# Altium PCB m18.PcbDoc
Units mm, origin at the board's own origin, x right, y up, seen from the top; angles counter-clockwise.
Board outline 152.4 x 101.6 mm, 2 copper layers (Top Layer, Bottom Layer); 50 components, 34 nets, 135 pads, 25 vias.
Unrouted connection lines stored in the file: 4.
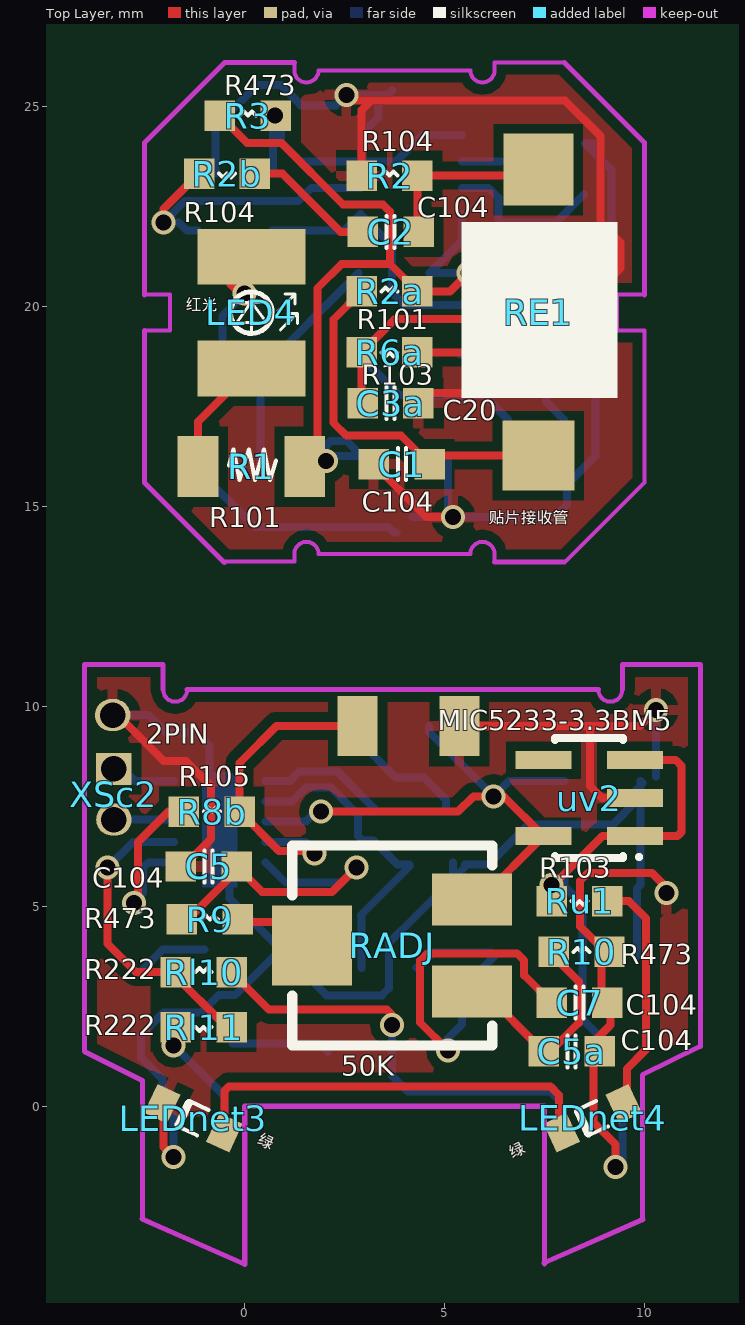
[diagram p0: Top Layer view]
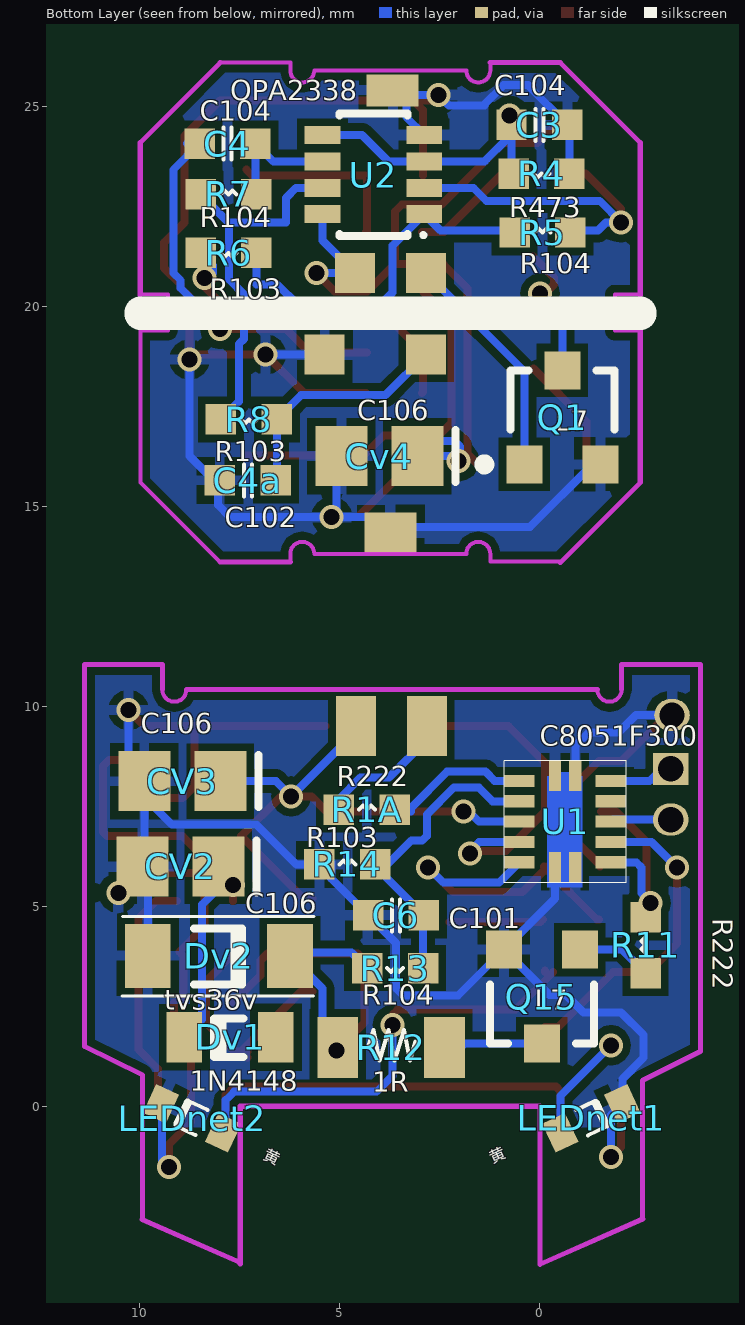
[diagram p1: Bottom Layer view, seen from below]

## Layer stack, top to bottom
Top Layer: signal copper 0.0356
Dielectric: dielectric 0.32, FR-4, Dk 4.8
Bottom Layer: signal copper 0.0356

## Board outline
-29.555,-27.62 122.845,-27.62 122.845,73.98 -29.555,73.98

## Design rules (kind name [scope] priority, off if disabled: settings)
Clearance [All] p1: gap=0.2
PolygonConnect [All] p1: connectstyle=Relief reliefconductorwidth=0.254 reliefentries=4 polygonreliefangle="90 Angle"
RoutingVias [All] p1: holewidth=0.4 width=0.6 viastyle="Through Hole" minholewidth=0.4 minwidth=0.6 maxholewidth=0.4 maxwidth=0.6
SilkToSilkClearance [All] p1 off: silktosilkclearance=0.254
SilkscreenOverComponentPads [All] p1 off: minsilkscreentomaskgap=0.254
SolderMaskExpansion [All] p1: expansion=0.102
TestPointUsage [All] p1: valid=0 allowmultiple=FALSE
Testpoint [All] p1: side=15 testpointundercomponent=TRUE minsize=1.016 maxsize=2.54 preferedsize=1.524 minholesize=0 maxholesize=1.016 preferedholesize=0.813 testpointgrid=0.025 style=1023 order=0-112345678
Width [All] p1: maxlimit=0.2 minlimit=0.2 preferedwidth=0.2
22 further rules are at their usual default settings.

## Components (designator, comment, footprint, x,y, rotation, side; value= is the part's Value field where it differs from the comment)
C1 "C104" C0603 4.623,16.053 r180 top
C2 "C104" C0603 4.345,21.858 r180 top
C3 "C104" C0603 0.711,24.536 r180 bottom
C3a "C20" C0603 2.946,17.577 r0 top
C4 "C104" C0603 8.51,24.068 r180 bottom
C4a "C102" C0603 6.604,15.646 r0 bottom
C5 "C104" C0603 -0.203,5.994 r180 top
C5a "C104" C0603 7.472,1.372 r0 top
C6 "C101" C0603 2.901,4.775 r0 bottom
C7 "C104" C0603 7.671,2.591 r0 top
CV2 "C106" C0805 8.992,5.994 r0 bottom
CV3 "C106" C0805 8.941,8.128 r0 bottom
Cv4 "C106" C0805 4.013,16.256 r0 bottom
Dv1 "1N4148" D0805 6.604,1.727 r0 bottom
Dv2 "tvs36v" D1206 8.026,3.759 r180 bottom
LED4 "红光" LED-1210#1 0.164,19.842 r0 top
LEDnet1 "黄" d0603 -0.508,-0.66 r155 bottom
LEDnet2 "黄" d0603 7.921,-0.658 r25 bottom
LEDnet3 "绿" d0603 -0.508,-0.66 r155 top
LEDnet4 "绿" d0603 9.475,0.067 r205 top
Q1 "L7" SOT23A -0.559,17.221 r180 bottom
Q15 "L7" SOT23A -0.051,2.743 r0 bottom
R1 "R101" R0805 1.5,15.991 r180 top
R1A "R222" R0603-A#1 5.029,7.417 r0 bottom
R2 "R104" R0603-A#2 4.318,23.266 r180 top
R2a "R101" R0603-A#2 4.318,20.371 r180 top
R2b "R104" R0603-A#1 0.254,23.317 r0 top
R3 "R473" R0603-A#2 0.776,24.765 r180 top
R4 "R473" R0603-A#2 0.66,23.317 r180 bottom
R5 "R104" R0603-A#2 -0.762,21.844 r0 bottom
R6 "R103" R0603-A#2 8.484,21.336 r180 bottom
R6a "R103" R0603-A#1 4.318,18.847 r0 top
R7 "R104" R0603-A#2 7.088,22.798 r0 bottom
R8 "R103" R0603-A#2 7.976,17.17 r180 bottom
R8b "R105" R0603-A#1 -1.524,7.366 r180 top
R9 "R473" R0603-A#1 -1.575,4.674 r180 top
R10 "R473" R0603-A#1 7.722,3.861 r180 top
R11 "R222" R0603-A#2 -2.642,4.724 r270 bottom
R12 "1R" R0805 2.388,1.473 r0 bottom
R13 "R104" R0603-A#2 4.318,3.454 r180 bottom
R14 "R103" R0603-A#2 4.115,6.045 r0 bottom
RADJ "50K" POT4MM-2 3.687,4.018 r180 top
RE1 "贴片接收管" LED-1210#2 7.342,19.839 r180 top
Rl10 "R222" R0603 -1.727,3.353 r0 top
Rl11 "R222" R0603 -0.33,1.981 r180 top
Ru1 "R103" R0603-A#2 7.671,5.131 r0 top
U1 "C8051F300" IC3-3-14P -0.63,7.116 r270 bottom
U2 "OPA2338" SOT23-8 2.896,22.301 r90 bottom
uv2 "MIC5233-3.3BM5" SOT-457 9.754,6.756 r90 top
XSc2 "2PIN" PIN2-1.27 -3.271,8.437 r0 top

## Footprints (in the part's own frame and the unit in brackets; to place one, negate y for a bottom-side part, rotate by r counter-clockwise, add the part's x,y. Pads: shape width x height; smd on the part's side, far side on the other; paste and mask are expansions set on the pad)
C0603 [mil]
  rect 30x30 smd: 1(0,0) 2(55,0)
  silkscreen extent 24,-16 31,16
C0805 [mm] "Chip Capacitor; Body 2.0 x 1.2 mm (LxW typ)"
  rect 1.3x1.5 smd: 1(-0.95,0) 2(0.95,0)
  silkscreen extent -1.9,-0.65 -1.9,0.65
d0603 [mm]
  rect 0.635x0.8 smd: 1(0,0) 2(1.715,0)
  silkscreen extent 0.6,-0.35 1.13,0.35
D0805 [mil]
  rect 35x50 smd: 1(0,0) 2(90,0)
  silkscreen extent 32,-19 61,20
D1206 [mil]
  rect 45x62.99 smd: 1(-70,0) 2(70,0)
  silkscreen extent -95,-39 94,39
IC3-3-14P [mil]
  rect 12x30 smd: 1(-40,-45) 2(-20,-45) 3(0,-45) 4(20,-45) 5(40,-45) 6(40,45) 7(20,45) 8(0,45) 9(-20,45) 10(-40,45)
  rect 30x12 smd: 11(-45,-10) 11(-45,10) 11(45,-10) 11(45,10)
  silkscreen extent -60,-60 60,60
LED-1210#1 [mil]
  rect 106.3x55 smd: 1(0,-55) 2(0,55)
  silkscreen extent -20,-20 45,20
LED-1210#2 [mil]
  rect 68.9x70.87 smd: 1(0,-140.75)
  rect 70.87x68.9 smd: 2(0,140.75)
  silkscreen extent -20,-20 45,20
PIN2-1.27 [mm]
  rect 0.889x0.8 hole 0.635: 1(0,0)
  oval 0.889x0.8 hole 0.635: 2(0,-1.27)
POT4MM-2 [mm] "Square Trimming Potentiometer"
  rect 2x1.3 smd: CCW(-2,-1.15) CW(-2,1.15)
  rect 2x2 smd: W(2,0)
  silkscreen extent -2.5,-2.5 2.5,2.5
R0603 [mil]
  rect 30x30 smd: 1(0,0) 2(55,0)
  silkscreen extent 20,0 35,4
R0603-A#1 [mil]
  rect 30x30 smd: 1(0,0) 2(-55,0)
  silkscreen extent -35,-4 -20,0
R0603-A#2 [mil]
  rect 30x30 smd: 1(0,0) 2(55,0)
  silkscreen extent 20,-4 35,0
R0805 [mil]
  rect 40x60 smd: 1(0,0) 2(105,0)
  silkscreen extent 28,-17 75,13
SOT23-8 [mm]
  rect 0.45x0.889 smd mask+0.07: 1(0,0) 2(0.66,0) 3(1.32,0) 4(1.98,0) 5(1.98,2.54) 6(1.32,2.54) 7(0.66,2.54) 8(0,2.54)
  silkscreen extent -0.57,-0.03 2.52,2.12
SOT23A [mm] "SOT-23; 3 Leads; Body 3.0 x 2.5 mm, inc. leads (LxW max)"
  rect 0.9x0.95 smd: 1(-0.95,-1.175) 2(0.95,-1.175) 3(0,1.175)
  silkscreen extent -2.07,-1.3 1.3,1.18
SOT-457 [mm]
  rect 0.45x1.397 smd: 1(0,0) 2(0.95,0) 3(1.9,0) 4(1.9,2.286) 5(0,2.286)
  silkscreen extent -0.57,-0.16 2.45,1.99

## Part data
C1 C2 C3 C3a C4 C4a C5 C5a C6 C7 CV2 CV3 Cv4: library part Cap, "Capacitor"
Dv1: library part "Diode 1N5407", "3 Amp Medium Power Silicon Rectifier Diode"
Dv2: library part "Diode BAT17", "Silicon RF Schottky Diode for Mixer Applications in the VHF/UHF Range"
LED4 LEDnet1 LEDnet2 LEDnet3 LEDnet4: library part LED0, "Typical INFRARED GaAs LED"
Q1 Q15: library part MMBT3904, "NPN Switching Transistor"
R1 R1A R2 R2a R2b R3 R4 R5 R6 R6a R7 R8 R8b R9 R10 R11 R12 R13 R14 Rl10 Rl11 Ru1: library part Res2, "Resistor"
RADJ: library part "RPot SM", "Square Trimming Potentiometer"
RE1: library part "Photo Sen", "Photosensitive Diode"
U2: library part LM833D, "Dual Low Noise, Audio Amplifier"
uv2: library part TPS77001

## Free pads (board coordinates)
  oval 0.889x0.8 hole 0.635: 0(-3.302,9.779)
  rect 1x1.5 smd: 0(2.824,9.504) 0(5.364,9.504)
  rect 1x1.5 smd far side: 0(2.824,9.504) 0(4.602,9.504)
  rect 1x1 smd far side: 0(2.844,18.796) 0(2.844,20.828) 0(4.622,20.828) 0(5.384,18.796)
  rect 1.3x0.8 smd far side: 0(3.683,25.4)
  rect 1.3x1 smd far side: 0(3.735,14.34)

## Via types
v1: diameter 0.6, hole 0.4, Top Layer to Bottom Layer, tented both sides, 25 vias

## Nets (pads, with @x,y where several pads share a name; then routed paths per layer and width w, separated by ;. In a path a pad name is that pad's centre, name@x,y a point inside that pad or via, vN(x,y) a via of type N, cw(c..) or ccw(c..) an arc to the next point about the centre after c; other vN are vias at no path point)
3.3V: CV3.1 Cv4.1 pad.0@4.602,9.504 pad.0@4.622,20.828 R1.1 R2a.1 R3.2 RADJ.CCW U1.3 U2.8 uv2.5 | length 35.9
  Top Layer w0.2: R3.2 0.06,24.084 0.917,24.084 2.462,22.539 3.453,22.539 3.629,22.364 3.629,21.06 3.637,21.052 ; R1.1 1.814,16.305 1.814,20.45 2.416,21.052 3.637,21.052 ; v1(1.905,7.366) 5.334,7.366 5.715,7.747 v1(6.223,7.747) 6.477,7.747 uv2.5 5.899,5.188 RADJ.CCW@5.687,5.188 ; v1(5.588,20.828) 5.131,20.371 R2a.1 3.637,21.052
  Bottom Layer w0.2: U1.3 1.528,7.116 1.778,7.366 v1(1.905,7.366) ; v1(2.032,16.129) 2.032,16.51 2.159,16.637 ; pad.0@4.602,9.504 4.602,9.368 v1(6.223,7.747) 6.604,8.128 CV3.1 ; U2.8 5.436,21.642 4.622,20.828 v1(5.588,20.828) ; 2.159,16.637 2.147,16.637 2.001,16.491 2.001,16.395 2.14,16.256 Cv4.1 2.921,16.256 2.54,16.637 2.159,16.637
24V: Dv1.1
+24V: CV2.1 Dv1.2 Ru1.1 uv2.1 uv2.3 | length 12
  Top Layer w0.2: Ru1.1 v1(7.671,5.537) 7.722,5.537 8.941,6.756 uv2.1 10.82,6.756 10.922,6.858 10.922,8.509 10.775,8.656 uv2.3
  Bottom Layer w0.2: CV2.1@7.62,5.588 v1(7.671,5.537) ; CV2.1@7.838,5.588 7.991,5.74 7.991,5.496 8.448,5.038 8.448,2.169 Dv1.2@9.093,1.524
ADC: C6.1 R13.2 R14.1 U1.2 | length 8
  Bottom Layer w0.2: U1.2 1.188,7.624 1.529,7.966 2.154,7.966 2.826,7.294 2.826,6.763 2.943,6.646 3.217,6.646 3.818,6.045 R14.1 4.115,5.989 C6.1 2.921,4.755 R13.2
GND: C1.2 C3.2 C3a.2 C4a.2 C5.2 C5a.2 C6.2 C7.2 CV2.2 CV3.2 Cv4.2 Dv2.1 LEDnet1.2 LEDnet2.2 LEDnet3.2 pad.0@3.683,25.4 pad.0@3.735,14.34 pad.0@5.364,9.504 pad.0@5.384,18.796 pad.0@-3.302,9.779 Q1.2 Q15.2 R2.2 R4.2 R10.2 R14.2 U1.11 U2.4 uv2.2 | length 110.9
  Top Layer w0.2: pad.0@-3.302,9.779 -3.175,9.779 -2.032,8.636 -1.473,8.636 -0.843,8.006 -0.843,6.685 -1.499,6.029 C5.2@-1.499,5.994 ; LEDnet3.2 LEDnet3.2@-2.062,0.097 ; LEDnet3.2@-1.905,-0.093 -2.032,-0.22 -2.032,-1.016 v1(-1.778,-1.27) ; v1@2.553,25.27 v1(2.54,25.283) 2.677,25.146 3.165,25.146 ; R2.2 2.921,24.902 3.165,25.146 ; C1.2 4.547,14.732 v1(5.207,14.732) ; C3a.2@4.343,17.831 5.893,17.831 v1(6.858,18.796) 8.636,18.796 v1(8.763,18.669) 8.763,20.233 8.982,20.452 8.982,20.539 9.398,20.955 9.398,21.59 8.89,22.098 8.89,24.257 8.001,25.146 3.165,25.146 ; pad.0@5.364,9.504 8.403,9.504 8.636,9.504 ; C7.2@8.915,2.591 8.915,3.759 9.017,3.861 8.387,4.491 8.387,5.636 8.582,5.831 10.179,5.831 10.541,5.469 v1(10.541,5.334) ; C7.2@9.144,2.591 9.144,2.032 8.718,1.606 8.718,1.221 8.718,-0.399 9.271,-0.951 v1(9.271,-1.524) ; uv2.2 8.931,7.706 8.636,8.001 8.636,9.504 ; v1(10.287,9.906) 9.885,9.504 8.636,9.504
  Bottom Layer w0.2: pad.0@-3.302,9.779 -2.403,9.779 -2.154,9.53 -1.964,9.339 -1.211,9.339 -0.884,9.012 -0.884,8.259 -0.376,8.259 U1.11@-0.376,5.973 ; v1(-1.778,-1.27) -1.778,-0.22 LEDnet1.2 -2.062,0.685 -2.594,1.217 -2.594,1.778 -2.029,2.343 -1.086,2.343 -0.65,2.779 -0.24,2.779 Q15.2 ; Q1.2 -1.314,16.046 0.254,14.478 3.597,14.478 3.735,14.34 pad.0@3.799,14.34 ; U1.11@-0.884,5.973 U1.11@-0.376,5.973 ; R4.2 C3.2@-0.737,24.486 ; -0.737,23.724 C3.2@-0.737,24.486 ; Q15.2@1.016,3.556 0.899,3.673 Q15.2 ; Q15.2@1.143,3.674 2.044,2.773 3.426,2.773 3.602,2.949 3.602,4.079 C6.2 5.512,5.989 R14.2 6.092,6.045 7.092,7.044 9.203,7.044 9.789,7.63 CV3.2@9.789,7.925 ; U2.4 3.341,24.726 3.341,25.058 3.683,25.4 3.566,25.283 v1(2.54,25.283) 2.276,25.019 1.397,25.019 1.392,25.024 1.392,25.042 0.907,25.527 0.305,25.527 C3.2 C3.2@-0.737,24.486 ; pad.0@4.191,14.732 v1@5.08,14.732 ; Cv4.2 5.08,16.139 v1@5.08,14.732 ; R14.2@5.207,5.684 R14.2@5.207,6.096 ; pad.0@5.384,18.796 v1(6.858,18.796) ; C4a.2 C4a.2@8.052,15.646 ; C4a.2@8.052,15.799 C4a.2@8.128,15.723 ; v1(8.763,18.669) 8.763,16.256 8.153,15.646 C4a.2@8.052,15.646 ; v1(9.271,-1.524) 9.45,-1.345 9.45,0.041 LEDnet2.2 ; Dv2.1 9.804,5.448 9.891,5.535 9.891,5.944 CV3.2 CV3.2@9.942,8.077 ; CV3.2@10.287,8.249 v1(10.287,9.906) ; U1.11@-0.376,5.973 -0.376,5.193 Q15.2 ; v1@5.08,14.732 v1(5.207,14.732) 7.747,14.732 8.052,15.037 C4a.2@8.052,15.646
NetC1_1: C1.1 R2a.2 RE1.2 | length 9.2
  Top Layer w0.2: R2a.2 2.214,19.664 2.214,17.09 2.54,16.764 3.912,16.764 C1.1 4.834,16.264 RE1.2
NetC2_1: C2.1 R2.1 RE1.1 | length 4.5
  Top Layer w0.2: C2.1 4.318,21.885 R2.1 7.194,23.266 RE1.1
NetC2_2: C2.2 R2b.1 | length 3.3
  Top Layer w0.2: R2b.1 0.94,23.317 2.399,21.858 C2.2
NetC3_1: C3.1 R3.1 R4.1 U2.3 U2.5 | length 7.6
  Top Layer w0.2: v1(0.762,24.765) R3.1 0.903,24.892 0.82,24.892 0.762,24.834 0.762,24.755 R3.1@0.89,24.627
  Bottom Layer w0.2: R4.1 0.711,23.368 C3.1 ; v1(0.762,24.765) 0.776,24.765 0.903,24.638 0.903,24.183 0.865,24.144 1.329,23.681 1.388,23.621 1.778,23.621 U2.3 3.785,23.621 4.445,24.281 U2.5
NetC3a_1: C3a.1 R6.1 R6a.2 | length 8.5
  Top Layer w0.2: R6a.2@2.921,19.05 R6a.2 ; C3a.1@2.946,17.831 2.921,17.856 R6a.2 ; v1(8.382,20.701) 8.382,20.485 7.982,20.085 6.438,20.085 6.038,19.685 3.759,19.685 R6a.2
  Bottom Layer w0.2: v1(8.382,20.701) 8.303,20.701 8.168,20.836 8.168,21.02 R6.1
NetC4_1: C4.1 R6a.1 | length 9.7
  Top Layer w0.2: R6a.1 5.766,18.847 6.35,19.431 v1(8.001,19.431)
  Bottom Layer w0.2: v1(8.001,19.431) 8.088,19.431 8.362,19.705 8.362,19.832 8.982,20.452 8.982,20.457 8.982,20.648 9.166,20.832 9.166,21.209 9.166,23.413 C4.1 C4.1@8.825,24.068
NetC4_2: C4.2 R7.1 U2.6 | length 3.1
  Bottom Layer w0.2: U2.6 6.666,23.621 C4.2 7.113,22.824 R7.1
NetC4a_1: C4a.1 pad.0@2.824,9.504 pad.0@2.844,18.796 R8.2 R8b.2 U1.4 | length 14.2
  Top Layer w0.2: v1(1.743,6.315) 1.743,6.385 0.854,6.385 R8b.2 -0.127,8.585 -0.076,8.636 0.792,9.504 pad.0@2.824,9.504
  Bottom Layer w0.2: U1.4 1.519,6.608 1.743,6.385 v1(1.743,6.315) ; pad.0@2.844,18.796 3.86,17.78 5.969,17.78 R8.2 6.579,15.672 C4a.1
NetC5_1: C5.1 R9.1 U1.5 | length 8.1
  Top Layer w0.2: R9.1@-1.473,4.674 -1.422,4.674 C5.1@-0.152,5.944 ; C5.1 C5.1@-0.152,5.944 ; C5.1@-0.102,5.994 C5.1@-0.152,5.944 ; v1(2.794,5.969) 2.18,5.355 0.437,5.355 C5.1@-0.152,5.944
  Bottom Layer w0.2: U1.5 1.026,5.588 2.413,5.588 v1(2.794,5.969)
NetC5a_1: C5a.1 R10.1 RADJ.CW | length 6
  Top Layer w0.2: RADJ.CW 5.976,2.868 C5a.1 ; C5a.1@7.315,1.219 C5a.1@7.391,1.295 ; C5a.1@7.315,1.372 C5a.1 ; R10.1@7.62,3.851 7.62,3.861 R10.1 7.722,3.75 8.352,3.119 8.352,2.086 7.638,1.372 C5a.1
NetLED4_1: LED4.1 R1.2 | length 3
  Top Layer w0.2: R1.2 -1.167,17.113 LED4.1
NetLED4_2: LED4.2 Q1.3 | length 3.5
  Top Layer w0.2: v1(0,20.32) -0.125,20.32 -0.351,20.546 -0.351,20.723 LED4.2 LED4.2@0.135,21.209
  Bottom Layer w0.2: Q1.3 -0.559,19.761 v1(0,20.32)
NetLEDnet1_1: LEDnet1.1 Rl11.2 | length 2.7
  Bottom Layer w0.2: v1(-1.778,1.524) -0.508,0.254 LEDnet1.1
NetLEDnet2_1: LEDnet2.1 Rl10.2 | length 11.3
  Top Layer w0.2: Rl10.2 0.61,2.413 3.556,2.413 3.683,2.286 v1(3.683,2.032) ; Rl10.2@-0.127,3.353 Rl10.2@-0.127,3.389
  Bottom Layer w0.2: v1(3.683,2.032) 3.683,0.762 4.082,0.363 7.644,0.363 7.856,0.151 7.856,-0.593 LEDnet2.1
NetLEDnet3_1: LEDnet3.1 LEDnet4.2 | length 10.5
  Top Layer w0.2: LEDnet3.1 -0.508,0.381 -0.399,0.49 7.644,0.49 7.856,0.278 7.856,-0.593 LEDnet4.2
NetLEDnet4_1: LEDnet4.1 Ru1.2 | length 6.2
  Top Layer w0.2: Ru1.2 9.601,5.131 10.033,4.699 10.033,1.416 9.555,0.938 9.555,0.147 LEDnet4.1 ; LEDnet4.1@9.415,0 LEDnet4.1@9.415,0.067 ; LEDnet4.1 9.45,0.067 9.45,0.092 LEDnet4.1
NetQ1_1: pad.0@2.824,9.504 pad.0@2.844,20.828 Q1.1 R1A.1 | length 9.2
  Bottom Layer w0.2: Q1.1 0.391,18.375 pad.0@2.844,20.828 ; pad.0@2.824,9.504 2.824,9.165 3.772,8.217 4.191,8.217 4.483,8.217 5.029,7.671 R1A.1
NetQ15_1: Q15.1 R11.2 | length 1.9
  Bottom Layer w0.2: R11.2 -2.051,3.918 Q15.1
NetQ15_3: Q15.3 R12.1 | length 2.5
  Bottom Layer w0.2: Q15.3@-0.305,1.568 1.886,1.568 R12.1@2.083,1.372
NetR1A_2: R1A.2 U1.1 | length 3.3
  Bottom Layer w0.2: U1.1 1.13,8.132 1.364,8.366 2.319,8.366 3.226,7.459 3.226,7.366
NetR2b_2: R2b.2 R5.1 U2.2 | length 7.8
  Top Layer w0.2: v1(-2.032,22.098) -2.032,22.428 R2b.2
  Bottom Layer w0.2: -1.168,21.895 -1.448,21.895 -1.651,22.098 v1(-2.032,22.098) -1.494,22.636 1.341,22.636 1.666,22.961 U2.2
NetR5_2: R5.2 R6.2 U2.1 | length 9.3
  Bottom Layer w0.2: R5.2 0.686,21.895 2.489,21.895 U2.1 3.683,21.514 3.683,20.343 3.998,20.028 6.052,20.028 6.573,20.549 7.087,20.549 R6.2
NetR7_2: R7.2 R8.1 U2.7 | length 9.4
  Bottom Layer w0.2: U2.7 6.096,22.961 6.35,22.707 6.35,22.098 7.785,22.098 ; R8.1 7.528,17.618 7.528,19.055 7.401,19.182 7.401,20.297 7.768,20.664 7.768,22.081 7.785,22.098 ; R7.2 7.785,22.098
NetR9_2: R9.2 RADJ.W | length 2.4
  Top Layer w0.2: R9.2@-0.076,4.674 -0.01,4.607 0.762,4.607 RADJ.W@2.256,4.607
NetRl10_1: Rl10.1 Rl11.1 U1.7 | length 8
  Top Layer w0.2: v1(-3.429,5.969) -3.429,4.064 -2.718,3.353 -1.829,3.353 -0.457,1.981 Rl11.1@-0.127,1.981
  Bottom Layer w0.2: v1(-3.429,5.969) -2.79,6.608 U1.7
NetU1_8: U1.8 XSc2.2 | length 1.5
  Bottom Layer w0.2: XSc2.2 -1.823,7.167 U1.8
NetU1_10: U1.10 XSc2.1 | length 1.6
  Bottom Layer w0.2: XSc2.1 -3.048,8.437 -2.743,8.132 U1.10
NO: C7.1 Dv2.2 R12.2 R13.1 | length 11.7
  Top Layer w0.2: v1(5.08,1.397) 4.387,2.09 4.387,3.642 4.563,3.818 6.811,3.818 6.987,3.643 6.987,3.275 C7.1
  Bottom Layer w0.2: R13.1@4.298,3.474 R13.1 4.709,3.846 6.162,3.846 Dv2.2 5.436,2.946 5.436,2.057 5.055,1.676 R12.2@5.055,1.372
OUT: R8b.1 R11.1 U1.6 | length 4.9
  Top Layer w0.2: v1@-2.667,5.08 -2.667,6.604 -1.905,7.366 R8b.1
  Bottom Layer w0.2: R11.1@-2.642,4.877 -2.642,5.231 -2.54,5.333 -2.54,5.969 -2.409,6.1 U1.6
  other v1: -2.769,5.08
pads on no net: U1.9 uv2.4

## Polygon pours and split planes (outlines as drawn)
GND on Top Layer "Bottom Solder-No Net" (solid, remove dead copper, pour order 1000): -4.699,26.67 -4.318,26.289 -4.318,-0.254 11.049,-0.254 11.176,-0.127 11.39,0.087 11.39,7.493 11.39,26.329 11.049,26.67 10.795,26.416 -4.445,26.416
GND on Bottom Layer "Bottom Solder-No Net" (solid, remove dead copper, pour order 1000): -4.035,-0.381 -4.191,-0.24 -4.191,26.134 11.401,26.134 11.557,26.275 11.557,-0.522 -3.567,-0.522 -3.879,-0.24
no net on Top Solder "Bottom Solder-No Net" (solid): 0.254,-4.191 0.254,-2.122 -0.217,-1.711 -1.001,-1.711 -1.472,-1.711 -1.942,-1.3 -2.413,-0.889 -2.908,-0.889 -2.908,-2.958 -2.921,-2.969
no net on Top Solder "Bottom Solder-No Net" (solid): 7.112,-4.191 7.112,-2.114 7.583,-1.702 8.367,-1.702 8.838,-1.702 9.308,-1.289 9.779,-0.876 10.274,-0.876 10.274,-2.954 10.287,-2.965
no net on Bottom Solder "Bottom Solder-No Net" (solid): 0.381,-4.191 0.381,-2.122 -0.108,-1.711 -0.924,-1.711 -1.414,-1.711 -1.903,-1.3 -2.393,-0.889 -2.908,-0.889 -2.908,-2.958 -2.921,-2.969
no net on Bottom Solder "Bottom Solder-No Net" (solid): 7.239,-4.191 7.239,-2.114 7.691,-1.702 8.444,-1.702 8.896,-1.702 9.347,-1.289 9.799,-0.876 10.275,-0.876 10.275,-2.954 10.287,-2.965

## Keep-outs
Keep-Out Layer:
  lines w0.1: -2.508,19.399 -1.873,19.399 -1.873,20.288 -2.508,20.288 ; -2.039,10.414 ccw(c-1.739,10.414) -1.439,10.414 ; -0.508,13.617 1.242,13.617 1.242,13.811 cw(c1.542,13.811) 1.842,13.811 5.642,13.811 ; 1.242,26.098 1.242,25.895 ccw(c1.542,25.895) 1.842,25.895 5.642,25.895 ccw(c5.942,25.895) 6.242,25.895 6.242,26.089 7.992,26.089 ; 1.905,13.811 5.642,13.811 ; 6.242,13.608 6.242,13.811 ccw(c5.942,13.811) 5.642,13.811 ; 7.992,13.589 9.992,15.589 ; 8.84,10.414 ccw(c9.14,10.414) 9.44,10.414 ; 9.303,19.399 9.992,19.399 ; 9.303,19.407 9.303,20.288 9.992,20.288 ; 9.992,19.399 9.992,15.598 9.992,19.399
  lines w0.127: -2.57,-2.817 0,-3.95 0,0 7.493,0 ; -2.56,-2.817 -2.56,0.645 -4.01,1.37 -4.01,11.049 -2.039,11.049 -2.039,10.414 ; -2.508,15.589 -0.508,13.589 ; -2.508,15.598 -2.508,19.399 ; -2.508,20.288 -2.508,24.089 -0.508,26.089 ; -1.439,10.414 8.84,10.414 ; -0.508,26.098 1.242,26.098 ; 6.242,13.608 7.992,13.608 ; 7.483,-3.915 9.95,-2.829 ; 7.992,26.089 9.992,24.089 9.992,20.288 ; 9.44,10.414 9.44,11.049 11.39,11.049 11.39,1.501 9.94,0.785 9.94,-2.806 ; 7.493,0 7.493,-3.937 7.493,0

## Other copper
Bottom Layer:
  rectangle net GND: -1.068,5.472 -0.179,8.259

## Silkscreen, mask and mechanical layers (free items; w line width, h text height)
Top Overlay:
  region: 9.318,17.712 9.318,22.112 5.418,22.112 5.418,17.712
Bottom Overlay:
  lines w0.8: -2.508,19.812 9.992,19.812 ; -2.508,19.839 9.992,19.839
Bottom Solder:
  rectangle: -1.068,5.472 -0.179,8.139